# Altium PCB V2.2.1.PcbDoc
Units mm, origin at the board's own origin, x right, y up, seen from the top; angles counter-clockwise.
Board outline 50 x 50 mm, 2 copper layers (Top Layer, Bottom Layer), stack 1.57 mm thick; 57 components, 44 nets, 215 pads, 95 vias.
Unrouted connection lines stored in the file: 2.
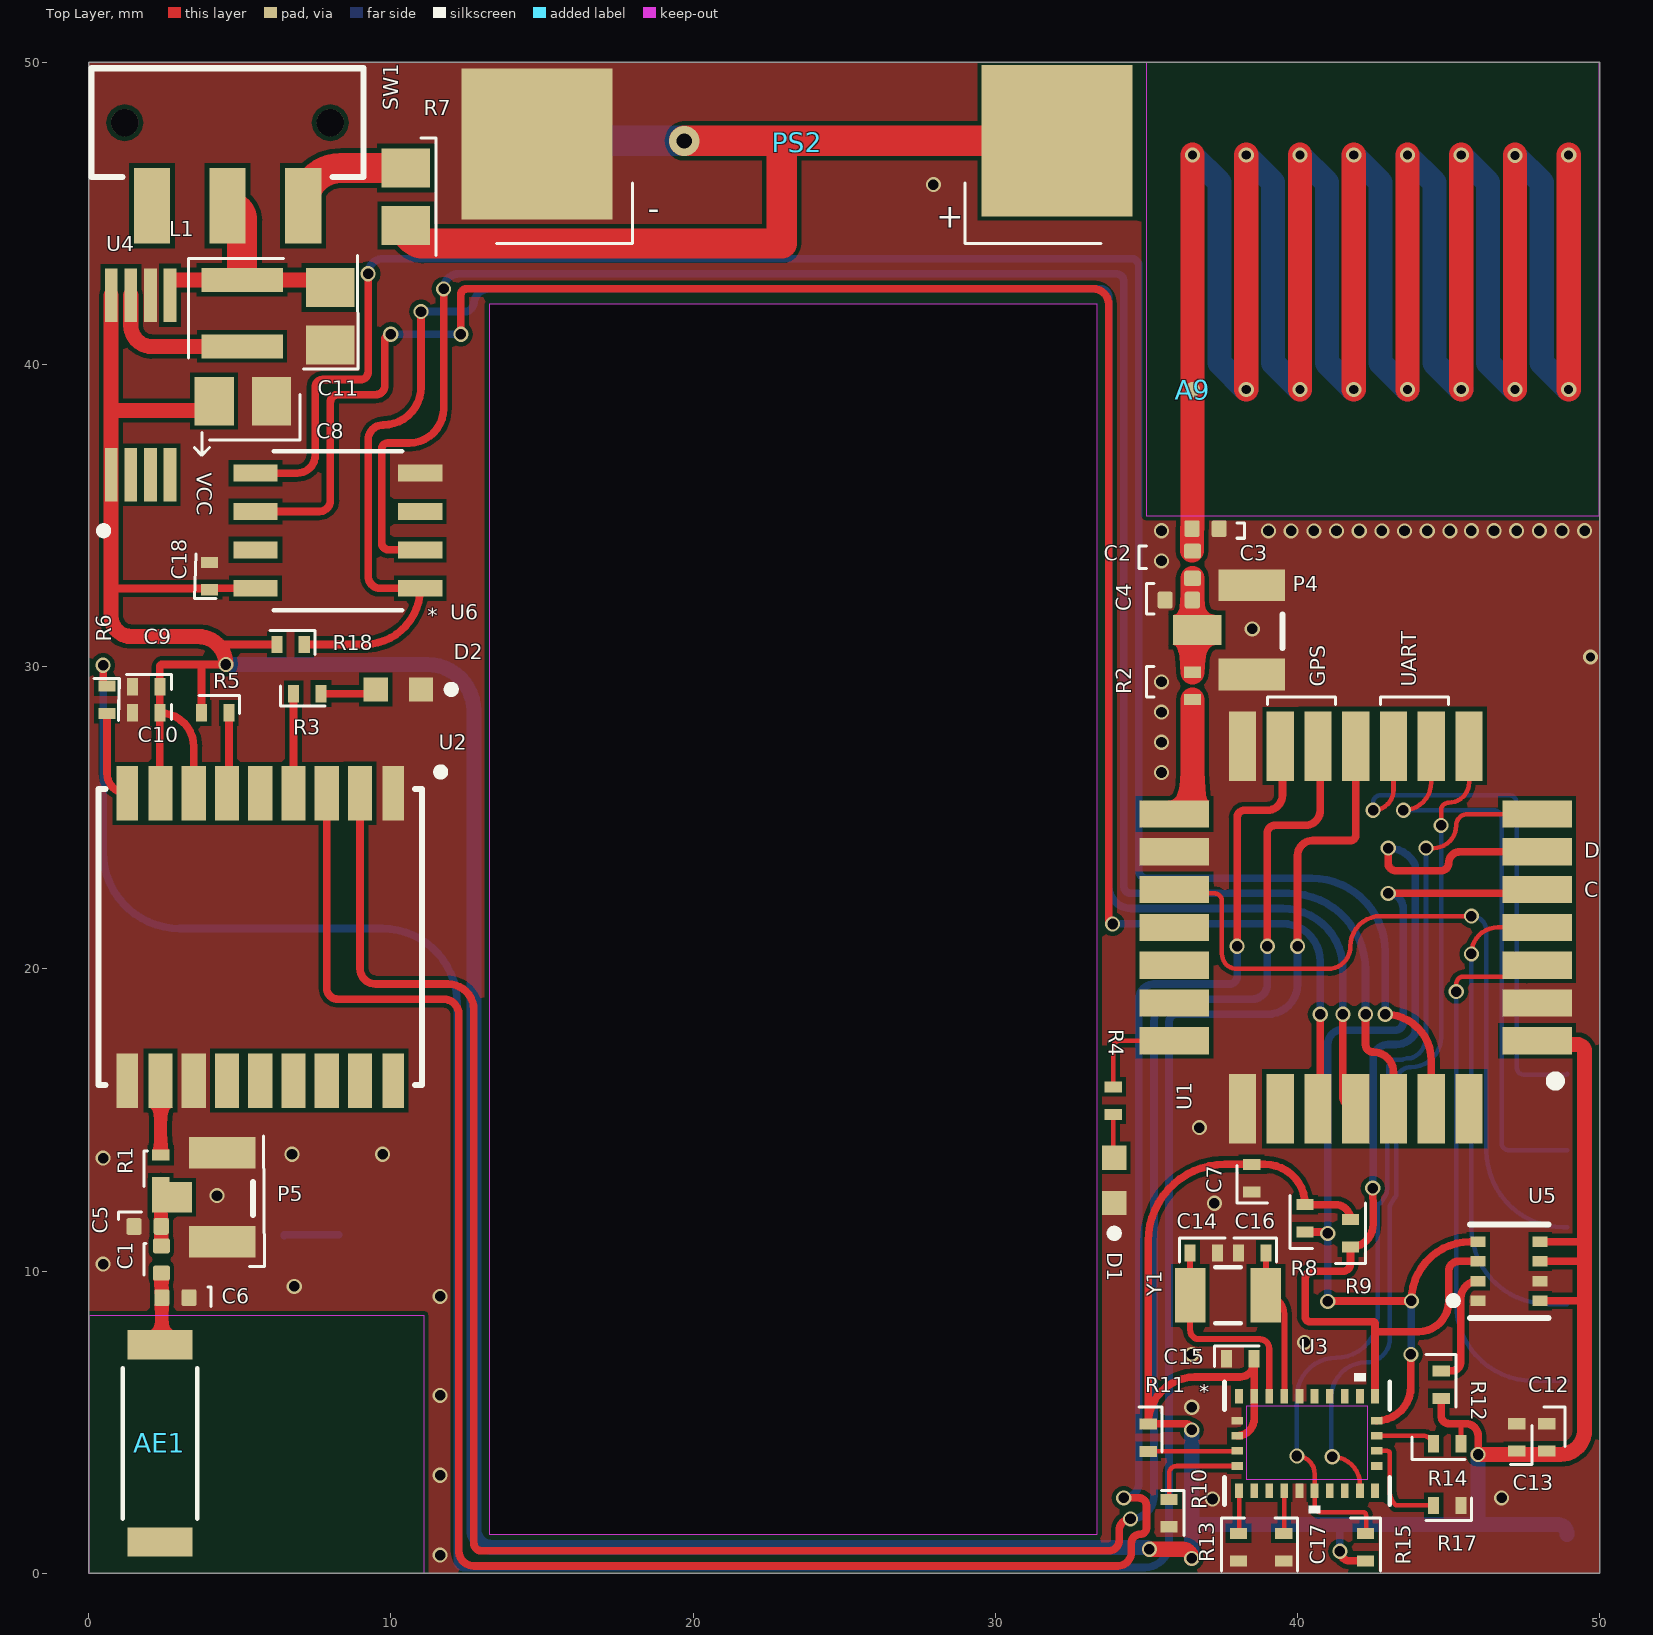
[diagram p0: Top Layer view]
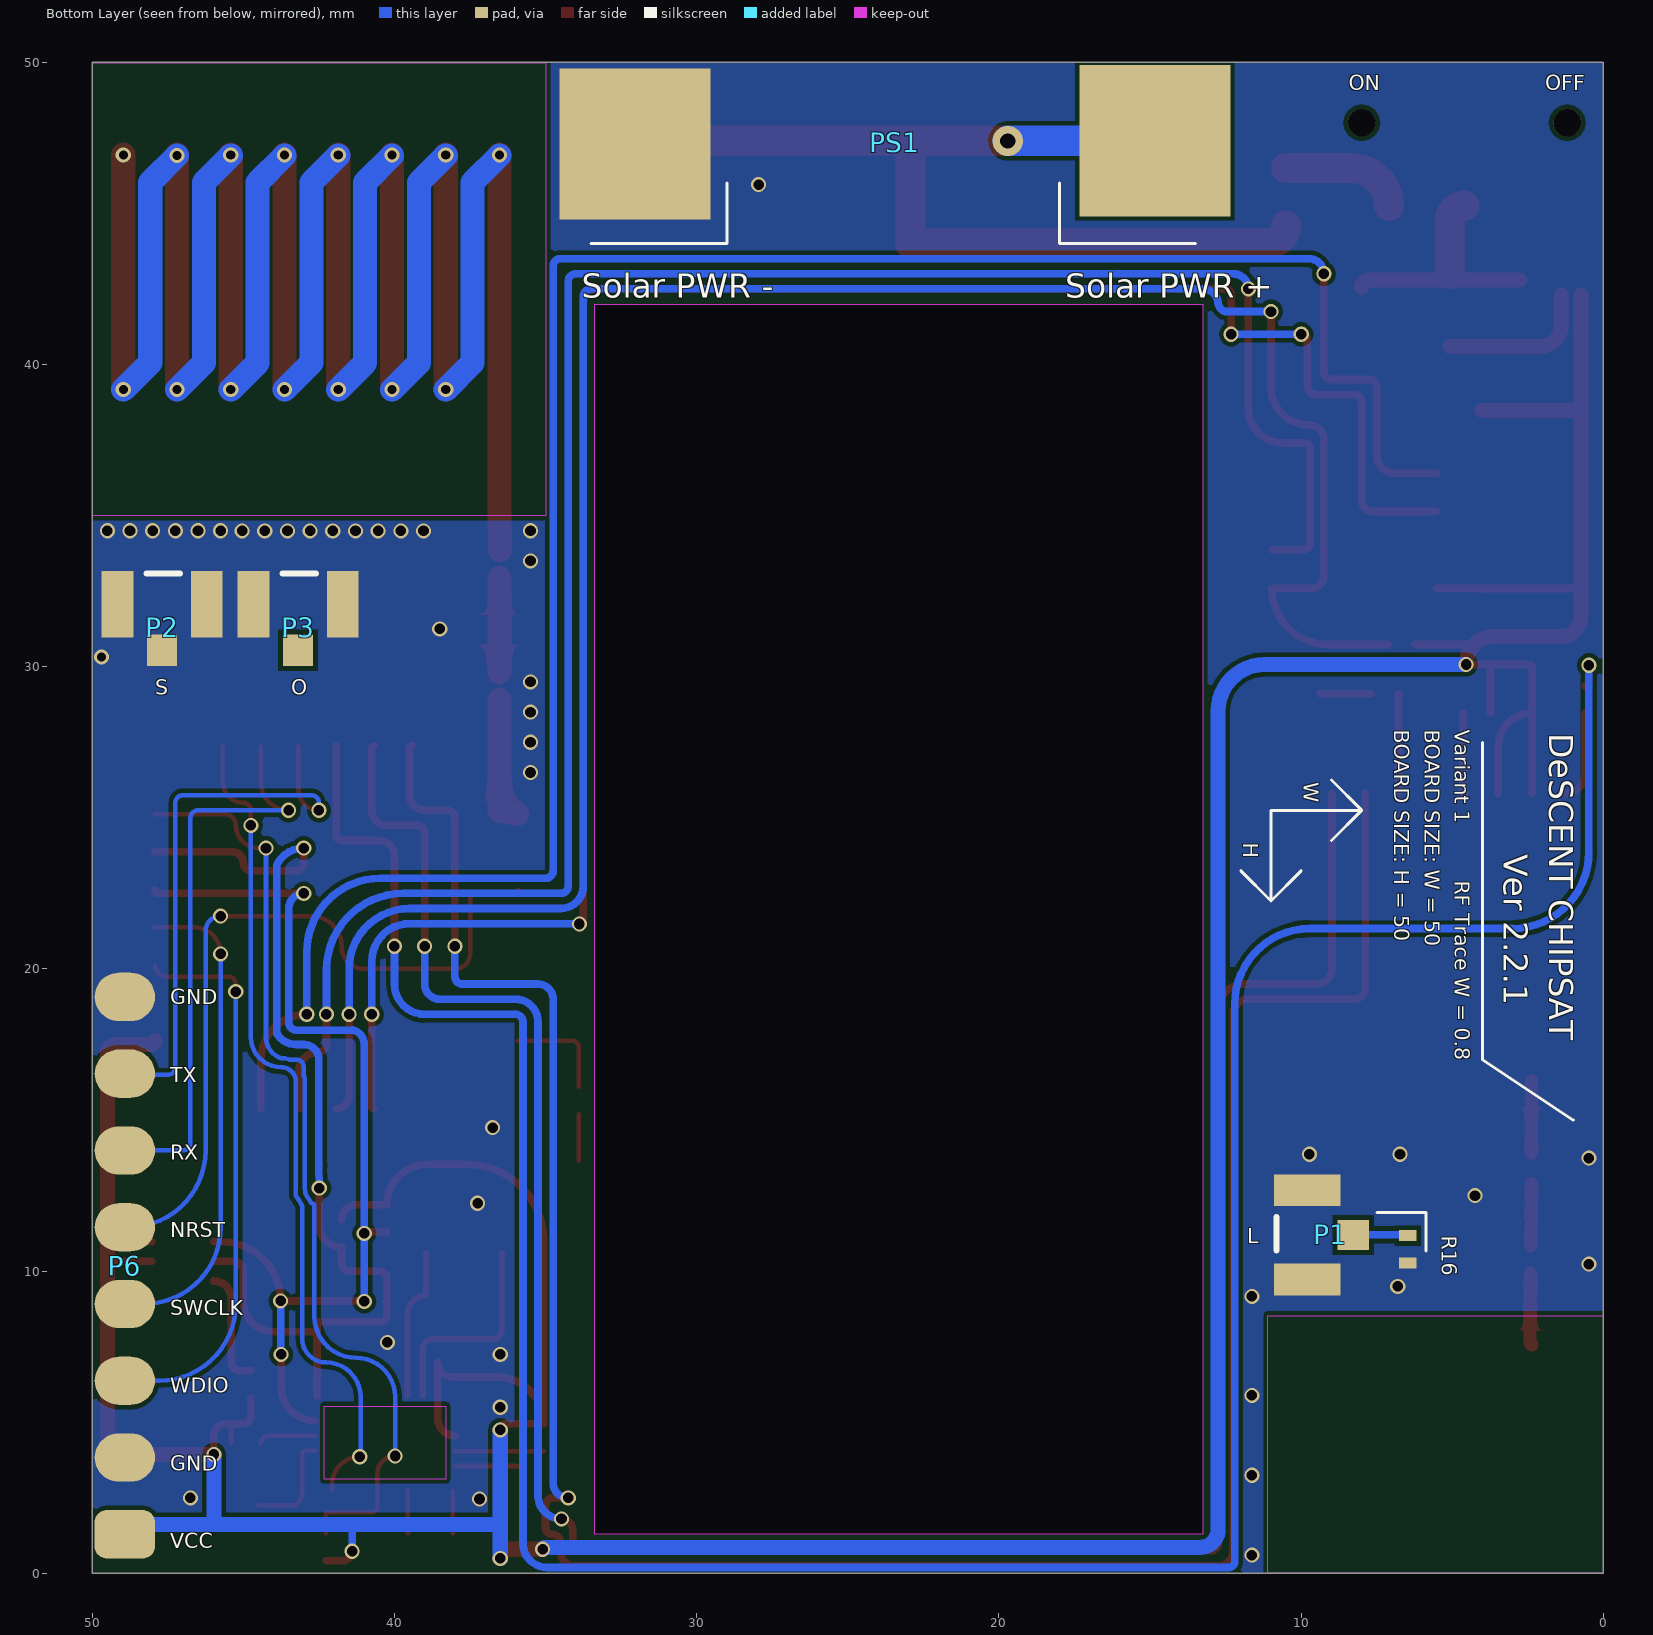
[diagram p1: Bottom Layer view, seen from below]

## Layer stack, top to bottom
Top Solder: solder mask 0.0254, SM-001, Dk 4
Top Layer: signal copper 0.035
Dielectric 1: dielectric 1.5, FR-4, Dk 4.8
Bottom Layer: signal copper 0.035
Bottom Solder: solder mask 0.0254, SM-001, Dk 4

## Board outline
0,0 50,0 50,50 0,50
cut-out: 13.259,42 13.259,1.295 33.376,1.295 33.376,42

## Design rules (kind name [scope] priority, off if disabled: settings)
Clearance [All] p1: gap=0.15 ignorepadtopadclearanceinfootprint=TRUE
ComponentClearance ComponentClearance_1 [InComponent('PS1')] p1: gap=0 collisioncheckmode=3 verticalgap=0 showdistances=FALSE
ComponentClearance [All] p2: gap=0 collisioncheckmode=3 verticalgap=0 showdistances=FALSE
MaxMinImpedance "Schematic Impedance Constraint_5" [InNet('LoRa_ANT_Tuning')] p1: minimum=49.00 maximum=51.00
MaxMinImpedance "Schematic Impedance Constraint_3" [InNet('GPS_ANT_Tuning')] p2: minimum=49.00 maximum=51.00
MaxMinImpedance "Schematic Impedance Constraint_2" [InNet('PI_NETWORK_LoRa')] p3: minimum=49.00 maximum=51.00
MaxMinImpedance "Schematic Impedance Constraint_1" [InNet('LoRa_ANT')] p4: minimum=49.00 maximum=51.00
MaxMinImpedance "Schematic Impedance Constraint" [InNet('PI_NETWORK_GPS')] p5: minimum=49.00 maximum=51.00
PlaneClearance [All] p1 off: clearance=0.508
PlaneConnect PlaneConnect_1 [InNet('VCC')] p1: planeconnectstyle=Direct reliefexpansion=0.508 reliefentries=4 reliefconductorwidth=0.254 reliefairgap=0.254
PlaneConnect [InNet('GND')] p2: planeconnectstyle=Direct reliefexpansion=0.508 reliefentries=4 reliefconductorwidth=0.254 reliefairgap=0.254
PolygonConnect [All] p1: connectstyle=Direct reliefconductorwidth=0.254 reliefentries=4 polygonreliefangle="90 Angle" airgapwidth=0.254
RoutingVias [All] p1: holewidth=0.711 width=1.27 viastyle="Through Hole" minholewidth=0.711 minwidth=1.27 maxholewidth=0.711 maxwidth=1.27
SolderMaskExpansion [All] p1: expansion=0.102 istentingtop=FALSE
SupplyNets "Schematic Supply Nets_1" [InNet('VCC')] p1: voltage=0.000
SupplyNets "Schematic Supply Nets" [InNet('GND')] p2: voltage=0.000
Width Width_1 [All] p1 off: maxlimit=0.254 minlimit=0.254 preferedwidth=0.254
Width [All] p2: maxlimit=1 minlimit=0.14 preferedwidth=0.254 minimp=50.000000 maximp=50.000000 favimp=50.000000 checkconnectedcopper=TRUE // min width
27 further rules are at their usual default settings.

## Classes and differential pairs
polygon class PolygonClass_1: GND_L01_P006

## Components (designator, comment, footprint, x,y, rotation, side; value= is the part's Value field where it differs from the comment)
A9 "helical_antenna_shorter_1_loop" LoRa_ANT_915_shorter_1_loop 35.128,34.087 r270 top
AE1 "1575AT43A0040E" ANT_1575AT_JOT-L 1.862,4.204 r90 top
C1 "C0402C223K8PACTU" PI_NET_CAPACITOR_0402 2.413,10.389 r270 top value="22,000 pF"
C2 "C0402C223K8PACTU" PI_NET_CAPACITOR_0402 36.525,33.376 r270 top value="22,000 pF"
C3 "C0402C223K8PACTU" PI_NET_CAPACITOR_0402 36.957,34.569 r180 top value="22,000 pF"
C4 "C0402C223K8PACTU" PI_NET_CAPACITOR_0402 36.068,32.207 r180 top value="22,000 pF"
C5 "C0402C223K8PACTU" PI_NET_CAPACITOR_0402 1.956,11.481 r180 top value="22,000 pF"
C6 "C0402C223K8PACTU" PI_NET_CAPACITOR_0402 2.875,9.125 r0 top value="22,000 pF"
C7 "4.7uF" 0402 38.481,13.081 r270 top
C8 "47uF" RCL_M0805 5.105,38.786 r0 top
C9 "0.1uF" 0402 1.905,29.337 r180 top
C10 "10uF" 0402 1.905,28.473 r180 top
C11 "47uF" RCL_M0805 8.001,41.595 r90 top
C12 "0.1uF" 0402 48.25,4.5 r90 top
C13 "10uF" 0402 47.25,4.5 r90 top
C14 "22pF" 0402 36.9,10.6 r0 top
C15 "0.1uF" 0402 38.1,7.1 r180 top
C16 "22pF" 0402 38.5,10.6 r180 top
C17 "0.1uF" 0402 39.548,0.873 r270 top
C18 "100nF" 0402 4,33 r90 top
D1 "LTST-C191TBKT" FP-LTST-C191TBKT-MFG 33.934,13.005 r90 top
D2 "LTST-C191TBKT" FP-LTST-C191TBKT-MFG 10.25,29.25 r180 top
L1 "10uH" "ASPI-0315FS_ASPI-0315FS - The_real_one" 5.08,41.699 r90 top
P1 "U.FL-R-SMT-1(01)" HRS-U.FL-R-SMT-3_V 9.804,11.201 r90 bottom
P2 "U.FL-R-SMT-1(01)" HRS-U.FL-R-SMT-3_V 47.69,32.072 r180 bottom
P3 "U.FL-R-SMT-1(01)" HRS-U.FL-R-SMT-3_V 43.19,32.072 r180 bottom
P4 "U.FL-R-SMT-1(01)" HRS-U.FL-R-SMT-3_V 38.481,31.217 r270 top
P5 "U.FL-R-SMT-1(01)" HRS-U.FL-R-SMT-3_V 4.42,12.446 r270 top
P6 "61300811121" "8pinhead Slightly wider" 48.92,10.185 r90 bottom
PS1 "ALTA_CELL" ALTA_CELL_SAME_SIZED_FEET_NO_SILK 23.444,47.346 r90 bottom
PS2 "ALTA_CELL" ALTA_CELL_SAME_SIZED_FEET_NO_SILK 23.444,47.346 r90 top
R1 "0k" 0402 2.388,13.386 r270 top
R2 "0k" 0402 36.525,29.362 r90 top
R3 "1k" 0402 7.239,29.108 r0 top
R4 "1k6" 0402 33.9,15.646 r90 top
R5 "0k" 0402 4.191,28.473 r0 top
R6 "0k" 0402 0.61,28.905 r270 top
R7 "0k" RCL_M0805 10.5,45.55 r90 top
R8 "2.2k" 0402 40.25,11.75 r90 top
R9 "2.2k" 0402 41.75,11.25 r90 top
R10 "10k" 0402 35.06,4.496 r90 top
R11 "10k" 0402 35.75,2 r270 top
R12 "4.7k" 0402 44.75,6.25 r270 top
R13 "10k" 0402 38.049,0.873 r270 top
R14 "10k" 0402 44.954,4.293 r180 top
R15 "10k" 0402 42.25,0.873 r270 top
R16 "50" 0402 6.475,10.725 r270 bottom
R17 "10k" 0402 44.954,2.25 r0 top
R18 "10k" 0402 6.683,30.734 r0 top
SW1 "JS102011SAQN" FP-JS102011SAQN-MFG 4.6,48 r180 top
U1 "MODULE_LORA_E5" MODULE28P-1-25-12X12X2-5MM 41.925,21.375 r180 top
U2 "MAX-M10S-00B" "FP-MAX-M10S-00B-MFG - duplicate" 5.682,21.057 r270 top
U3 "BNO085" QFN28_BNO086_CEV 40.314,4.305 r0 top
U4 "L6920" L6920_L6920 1.722,39.321 r0 top
U5 "d58e2f6669bc67e6a2bc6a28610ca79" FP-BME280-MFG 47,10 r180 top
U6 "W25Q16JVSNIQ" SOIC_150MIL_WIN 8.25,34.5 r180 top
Y1 "9HT10-32.768KBZF-T" XTAL_9HT10_TXC 37.7,9.2 r180 top

## Footprints (in the part's own frame and the unit in brackets; to place one, negate y for a bottom-side part, rotate by r counter-clockwise, add the part's x,y. Pads: shape width x height; smd on the part's side, far side on the other; paste and mask are expansions set on the pad)
"8pinhead Slightly wider" [mm] "Pin Header, pitch 2.54 mm, THT, Vertical, single row, 8p"
  rrect50% 1.6x2 smd: 1(-8.89,0)
  oval 1.6x2 smd: 2(-6.35,0) 3(-3.81,0) 4(-1.27,0) 5(1.27,0) 6(3.81,0) 7(6.35,0) 8(8.89,0)
0402 [mm]
  rect 0.365x0.572 smd paste+0 mask+0: 1(-0.454,0) 2(0.454,0)
ALTA_CELL_SAME_SIZED_FEET_NO_SILK [mm] "SAME SIZED FEET AND CORRECT POLARITY AND SILK CUT"
  rect 5x5 smd: +(0.056,-8.603) -(-0.055,8.603)
ANT_1575AT_JOT-L [mm]
  rect 0.963x2.16 smd paste+0 mask+0: 1(3.363,-0.5) 2(-3.163,-0.5)
  Keep-Out Layer region: 4.318,-9.238 4.318,1.86 -4.2,1.86 -4.2,-9.238
  silkscreen extent -2.39,-1.73 2.59,0.73
"ASPI-0315FS_ASPI-0315FS - The_real_one" [mil]
  rect 31.5x106.3 smd: 1(-43.31,0) 2(43.31,0)
FP-BME280-MFG [mm]
  rect 0.5x0.35 smd paste+0 mask+0: 1(1.025,0.975) 2(1.025,0.325) 3(1.025,-0.325) 4(1.025,-0.975) 5(-1.025,-0.975) 6(-1.025,-0.325) 7(-1.025,0.325) 8(-1.025,0.975)
  silkscreen extent -1.3,-1.55 1.97,1.55
FP-JS102011SAQN-MFG [mm]
  rect 1.2x2.5 smd paste+0 mask+0: 1(-2.5,2.75) 2(0,2.75) 3(2.5,2.75)
  round 0.9 hole 0.9 unplated paste-2539.97 mask+0: ""(-3.4,0) ""(3.4,0)
  silkscreen extent -4.5,-1.8 4.5,1.8
FP-LTST-C191TBKT-MFG [mm]
  rect 0.8x0.8 smd paste+0 mask+0: 1(-0.75,0) 2(0.75,0)
  silkscreen extent -1.87,-0.13 -1.63,0.12
"FP-MAX-M10S-00B-MFG - duplicate" [mm]
  rect 1.8x0.7 smd paste-1000 mask+0: 1(-4.75,4.4) 9(-4.75,-4.4) 10(4.75,-4.4) 18(4.75,4.4)
  rect 1.8x0.8 smd paste-1000 mask+0: 2(-4.75,3.3) 3(-4.75,2.2) 4(-4.75,1.1) 5(-4.75,0) 6(-4.75,-1.1) 7(-4.75,-2.2) 8(-4.75,-3.3) 11(4.75,-3.3) 12(4.75,-2.2) 13(4.75,-1.1) 14(4.75,0) 15(4.75,1.1) 16(4.75,2.2) 17(4.75,3.3)
  silkscreen extent -5.59,-5.35 4.9,6.09
HRS-U.FL-R-SMT-3_V [mm] "SMT, 3-Leads, Body 2.6x2.6mm"
  rect 1.05x2.2 smd: 1(-1.475,0) 2(1.475,0)
  rect 1x1.05 smd: 3(0,-1.525)
  silkscreen extent -0.51,1.02 0.59,1.02
L6920_L6920 [mm]
  rect 0.42x1.78 smd: 1(-0.975,-2.97) 2(-0.325,-2.97) 3(0.325,-2.97) 4(0.975,-2.97) 5(0.975,2.97) 6(0.325,2.97) 7(-0.325,2.97) 8(-0.975,2.97)
LoRa_ANT_915_shorter_1_loop [mil]
  round 20 smd paste-99999 mask+0: ANT(-200,55)
  Top Layer lines w31.5: -200,55 -505.87,55 ; -200,125 -505.87,125 ; -200,195 -505.87,195 ; -200,265 -505.87,265 ; -200,335 -505.87,335 ; -200,405 -505.87,405 ; -200,475 -505.87,475 ; -200,545 -505.87,545
  Bottom Layer lines w10: -505,55 -505.43,55 ; -505,125 -505.43,125 ; -505,195 -505.43,195 ; -505,265 -505.43,265 ; -505,335 -505.43,335 ; -505,405 -505.43,405 ; -505,475 -505.43,475 ; -505,545 -505.43,545
  Bottom Layer lines w31.5: -505,55 -470,90 -235,90 -200,125 ; -505,125 -470,160 -235,160 -200,195 ; -505,195 -470,230 -235,230 -200,265 ; -505,265 -470,300 -235,300 -200,335 ; -505,335 -470,370 -235,370 -200,405 ; -505,405 -470,440 -235,440 -200,475 ; -505,475 -470,510 -235,510 -200,545
  Keep-Out Layer region: -625.98,-5.55 -35.43,-5.55 -35.43,585 -625.98,585
MODULE28P-1-25-12X12X2-5MM [mm]
  rect 2.3x0.9 smd: 1(-6,3.75) 2(-6,2.5) 3(-6,1.25) 4(-6,0) 5(-6,-1.25) 6(-6,-2.5) 7(-6,-3.75) 15(6,-3.75) 16(6,-2.5) 17(6,-1.25) 18(6,0) 19(6,1.25) 20(6,2.5) 21(6,3.75)
  rect 0.9x2.3 smd: 8(-3.75,-6) 9(-2.5,-6) 10(-1.25,-6) 11(0,-6) 12(1.25,-6) 13(2.5,-6) 14(3.75,-6) 22(3.75,6) 23(2.5,6) 24(1.25,6) 25(0,6) 26(-1.25,6) 27(-2.5,6) 28(-3.75,6)
  silkscreen extent -6.73,4.95 -6.48,5.21
PI_NET_CAPACITOR_0402 [mm] "Chip Capacitor, Body 1.0x0.5mm, Height 0.6mm, NO SILK"
  rrect25% 0.5x0.55 smd: 1(-0.45,0) 2(0.45,0)
QFN28_BNO086_CEV [mil]
  rect 10x19 smd paste+0 mask+0: 1(-88.58,61.5) 6(-88.58,-61.5) 7(-68.9,-61.5) 8(-49.21,-61.5) 9(-29.53,-61.5) 10(-9.84,-61.5) 11(9.84,-61.5) 12(29.53,-61.5) 13(49.21,-61.5) 14(68.9,-61.5) 15(88.58,-61.5) 20(88.58,61.5) 21(68.9,61.5) 22(49.21,61.5) 23(29.53,61.5) 24(9.84,61.5) 25(-9.84,61.5) 26(-29.53,61.5) 27(-49.21,61.5) 28(-68.9,61.5)
  rect 15x10 smd paste+0 mask+0: 2(-91,29.53) 3(-91,9.84) 4(-91,-9.84) 5(-91,-29.53) 16(91,-29.53) 17(91,-9.84) 18(91,9.84) 19(91,29.53)
  silkscreen extent -108,-91 107,91
RCL_M0805 [mm]
  rect 1.3x1.6 smd: 1(-0.95,0) 2(0.95,0)
SOIC_150MIL_WIN [mil]
  rect 57.5x22 smd paste+0 mask+0: 1(-107.25,75) 2(-107.25,25) 3(-107.25,-25) 4(-107.25,-75) 5(107.25,-75) 6(107.25,-25) 7(107.25,25) 8(107.25,75)
  silkscreen extent -84,-104 83,104
XTAL_9HT10_TXC [mil]
  rect 39.5x71 smd paste+0 mask+0: 1(-49.25,0) 2(49.25,0)
  silkscreen extent -16,-36 16,36

## Part data
A9: "helical_antenna schematic for the DeSCENT v1 ChipSat"
AE1: "No Description Available", Mfr_Name="Johanson Technology", Digi-Key_Part_Number_1=712-1003-2-ND, Digi-Key_Part_Number_2=712-1003-1-ND, Digi-Key_Part_Number_3=712-1003-6-ND
C1 C2 C3 C4 C5 C6: library part 0402RFCapacitor_NO_SILK, "CAP CER 0.022UF 10V X5R 0402", Capacitance="22,000 pF", Manufacturer=Kemet, Package=C0402-BB, Temperature="-55°C to +125°C", Temperature Characteristic=X5R, Temperature Coefficient=15%, Temperature Range High=+125°C, Temperature Range Low=-55°C, Tolerance=0.1, Voltage Rating="10 V", Automotive=No, Category=Cap, ComponentLink2Description=Datasheet, ComponentLink2URL=https://content.kemet.com/datasheets/KEM_C1002_X7R_SMD.pdf, Device Class L1="Passive Components", Device Class L2=Capacitors, Device Class L3="Ceramic Capacitors", Digikey Description="CAP CER 0.022UF 10V X5R 0402", Height=0.55mm, Ipc Land Pattern Name=CAPC10050X50, Lead Free=Yes, Manufacturer Part Number=C0402C223K8PACTU, Material=Ceramic, Mouser Description="Multilayer Ceramic Capacitors MLCC - SMD/SMT 10volts 22000pF X5R 10%", Octopart=https://octopart.com/c0402c223k8pactu-kemet-140074, RoHS=TRUE
C7 C8 C9 C10 C11 C12 C13 C14 C15 C16 C17: library part C-EUC0805K, "CAPACITOR, European symbol", DeviceName=C0805K, DeviceSetName=C-EU, GateName_1=G$1, LibraryName=rcl, SymbolName_1=C-EU
C18: library part RCL_C-EUC0805, Package=RCL_C0805, DeviceName=C0805, DeviceSetName=RCL_C-EU, GateName_1=G$1, LibraryName=AmbaSat-1v1-01-NO-solar, SymbolName_1=RCL_C-EU
D1 D2: library part CMP-22017-000008-1, "LED BLUE CLEAR CHIP SMD", Case Code (Imperial)=0603, Case Code (Metric)=1608, Color=Blue, Forward Current=20mA, Forward Voltage=3.8V, Lens Color=Colorless, Max Operating Temperature=80°C, Max Power Dissipation=75mW, Min Operating Temperature=-20°C, Package Quantity=1, Power Dissipation=76mW, Reverse Voltage=5V, Case/Package=0603, Depth=1.6mm, Dominant Wavelength=475nm, Height=0.55mm, Illumination Color=Blue, Lead Free="Lead Free", Length=0.8mm, Lens Style=Diffused, Lens Transparency=Clear, Luminous Intensity=180mcd, Mount="Surface Mount", Number of Elements=1, Number of LEDs=1, Number of Pins=2, Packaging="Tape and Reel", Radiation Hardening=No, Test Current=20mA, Viewing Angle=130°, Wavelength=468nm, Width=0.8mm
L1: library part ASPI-0315FS, DeviceSetName=ASPI-0315FS, GateName_1=G$1, LibraryName=ASPI-0315FS, SymbolName_1=ASPI-0315FS
P1 P2 P3 P4 P5: library part CN-1P-M-R3, "Ultra Small Coaxial Connector, 6 GHz, -40 to 90 degC, 3-Pin SMD, RoHS, Bulk", Dielectric Material=LiquidCrystalPolymer(LCP), Frequency - Max=6GHz, Housing Color=Silver, Manufacturer="Hirose Electric", Operating Temperature=-40degC~90degC, Package Description="3-Pin Surface Mount Device, Body 2.6 x 2.6 mm", Package Reference=U.FL-R-SMT, Standard Package=100, Body Finish=Silver, Body Material=PhosphorBronze, Category=Connectors,Interconnects, Center Contact Material=PhosphorBronze, Center Contact Plating=Gold, Connector Style=U.FL, Connector Type=Jack,MalePin, Contact Termination=Solder, Datasheet URL=https://datasheet.ciiva.com/26945/getdatasheetpartid-475239-26945414.pdf, Datasheet Version=Feb-09, Dynamic Catalog=U.FLSeries, Family=CoaxialConnectors(RF), Fastening Type=Snap-On, Featured Product=HiroseU.FLSeries, Impedance=50Ohm, Manufacturer URL=https://www.hirose.com, Minimum Quantity=UltraMiniatureCoaxial, Mounting Type=SurfaceMount, Online Catalog=U.FLSeries, Other Names="H122041 / U.FL-R-SMT-1(01)-ND", Packaging=Bulk, Quantity Available=Bulk, Series=U.FL, Shield Termination=Solder, Unit PriceUSD=U.FL
P6: library part 8pinhead, Color=Black, Contact Resistance=20mΩ, Current Rating=3A, Max Operating Temperature=105°C, Min Operating Temperature=-40°C, Operating Supply Voltage=250V, Connector Type="Male Pin", Contact Material=Copper, Contact Mating Length=5.9944mm, Contact Plating=Gold, Gender=Male, Height=8.54mm, Lead Pitch=2.54mm, Mount="Through Hole", NexarPartId=32855533, Number of Contacts=8, Number of Pins=8, Number of Positions=8, Number of Rows=1, Orientation=Vertical, Packaging=Bulk, Pitch=2.54mm, REACH SVHC=Unknown, RoHS=Compliant, Termination=Solder, Voltage Rating=250V
PS1 PS2: library part ALTA_CELL_RESIZED_NO_SILK, "No SILK", DeviceSetName=ALTA_CELL, GateName_1=G$1, LibraryName=ALTA_CELL, SymbolName_1=ALTA_CELL
R1 R2: library part R-EU_M0805, DeviceName=M0805, DeviceSetName=R-EU_, GateName_1=G$1, LibraryName=rcl, SymbolName_1=R-EU
R3 R4 R5 R6 R8 R9 R10 R11 R12 R13 R14 R15 R16 R17 R18: library part R-EU_M0805, "RESISTOR, European symbol", DeviceName=M0805, DeviceSetName=R-EU_, GateName_1=G$1, LibraryName=rcl, SymbolName_1=R-EU
R7: library part R-EU_M0805, "Larger Resistor for Solar", DeviceName=M0805, DeviceSetName=R-EU_, GateName_1=G$1, LibraryName=rcl, SymbolName_1=R-EU
SW1: library part CMP-2000-06501-2, "SWITCH SLIDE SPDT 300MA 6V", Case/Package=100, Contact Current Rating=300mA, Contact Resistance=70mR, Max Operating Temperature=85°C, Max Voltage Rating (DC)=6V, Min Operating Temperature=-40°C, Package Quantity=1, Actuator Length=2mm, Actuator Material=Nylon, Actuator Type=Standard, Contact Material="Copper Alloy", Contact Plating=Silver, Current Rating=300mA, Electrical Life=5000Cycles, Housing Material=Nylon, Illumination Type=Non-Illuminated, Lead Free="Lead Free", Length=9mm, Max Current Rating=300mA, Mount="Surface Mount", Orientation="Right Angle", Packaging="Tape and Reel", Radiation Hardening=No, REACH SVHC="No SVHC", Switch Function=On-On, Switch Travel=2mm, Termination="Gull Wing", Throw Configuration=SPDT, Voltage Rating (DC)=6V
U1: Package=MODULE28P-1.25-12X12X2.5MM, DeviceSetName=MODULE_LORA_E5, GateName_1=G$1, LibraryName=LORA-E5_Eagle_Library, SymbolName_1=MOUDLE_LORA_E5
U2: library part CMP-207130-000026-1, "GNSS LCC RX, ROM, TCXO, LNA, SAW"
U3: library part BNO086, "No Description Available", Mfr_Name=CEVA, RefDes=RefDes, Type="Motion Sensors"
U4: "Voltage stepper upper L6920DTR model", DeviceSetName=L6920, GateName_1=G$1, LibraryName=L6920, SymbolName_1=L6920
U5: "Temp and huminity sensor"
U6: "No Description Available", Mfr_Name=Winbond, RefDes=RefDes, Type=Type
Y1: "Crystal, 32.768khz, 12.5pf, 3.2 x 1.5mm", Package=None, Availability=Unavailable, MP=9HT10-32.768KBZF-T, Price=None

## Free pads (board coordinates)
  rect 1x1 smd: 1(36.373,31.217)
  rect 0.5x1 smd: 2(2.35,12.45)

## Via types
v1: diameter 0.5, hole 0.35, Top Layer to Bottom Layer, tented both sides, 46 vias
v2: diameter 0.5, hole 0.35, Top Layer to Bottom Layer, 32 vias
v3: diameter 0.5, hole 0.3, Top Layer to Bottom Layer, 15 vias
v4: diameter 1, hole 0.5, Top Layer to Bottom Layer, tented both sides, 1 vias
v5: diameter 0.5, hole 0.3, Top Layer to Bottom Layer, tented both sides, 1 vias

## Nets (pads, with @x,y where several pads share a name; then routed paths per layer and width w, separated by ;. In a path a pad name is that pad's centre, name@x,y a point inside that pad or via, vN(x,y) a via of type N, cw(c..) or ccw(c..) an arc to the next point about the centre after c; other vN are vias at no path point)
CS: R18.2 U1.25 U6.1 | length 73.6
  Top Layer w0.254: R18.2 9.113,30.734 ccw(c9.113,32.595) U6.1 9.655,32.595 cw(c9.655,33) 9.25,33 9.25,37.5 cw(c9.75,37.5) 9.75,38 ccw(c9.75,39.25) 11,39.25 v1(11,41.75) ; v1(41.5,18.5) 41.5,15.8 ccw(c41.925,15.8) U1.25
  Bottom Layer w0.254: v1(11,41.75) 12.467,41.75 ccw(c12.467,42.004) 12.685,41.873 cw(c13.628,41.3) 12.71,41.913 ccw(c12.498,42.052) 12.751,42.034 ; 12.751,42.035 cw(c13.25,42) 13.25,42.5 33.5,42.5 cw(c33.5,42.25) 33.75,42.25 33.75,22.75 ccw(c34.5,22.75) 34.5,22 39.5,22 cw(c39.5,20) 41.5,20 v1(41.5,18.5)
GND: C3.1 C4.2 C5.2 C6.2 C7.2 C8.2 C9.2 C10.2 C11.1 C12.2 C13.2 C14.2 C15.2 C16.2 C17.2 C18.2 D1.1 D2.1 P1.1 P1.2 P2.1 P2.2 P2.3 P3.1 P3.2 P4.1 P4.2 P5.1 P5.2 P6.2 P6.8 PS1.- PS2.- R11.2 R13.2 R16.2 R17.2 U1.2 U1.14 U1.16 U1.22 U2.1 U2.10 U2.12 U3.2 U3.10 U3.25 U4.6 U5.1 U5.7 U6.4
  other v1: 37.186,2.464 46.75,2.5 36.5,5.5 36.5,7.25 40.234,7.645 37.25,12.25 36.75,14.75 27.95,45.95
  other v2: 11.633,0.61 11.633,3.251 11.633,5.893 11.633,9.169 6.807,9.5 0.483,10.236 4.25,12.5 0.483,13.741 6.731,13.868 9.728,13.868 35.5,26.5 35.5,27.5 35.5,28.5 35.5,29.5 38.5,31.25 35.5,33.5 35.5,34.5 39.04,34.493 39.79,34.493 40.54,34.493 41.29,34.493 42.04,34.493 42.79,34.493 43.54,34.493 44.29,34.493 45.04,34.493 45.75,34.5 46.5,34.5 47.25,34.5 48,34.5 48.75,34.5 49.5,34.5
  other v5: 49.69,30.322
GPS_ANT: AE1.1 C1.2 C6.1 | length 2.4
  Top Layer w0.43: AE1.1 ccw(c2.362,7.63) 2.425,7.63 C6.1 2.413,9.125 C1.2
GPS_ANT_Tuning: C1.1 C5.1 P5.3 pad.2 R1.2 | length 2.1
  Top Layer w0.43: pad.2@2.388,12.9 2.388,11.541 C5.1 C1.1
GPS_RESET: R6.1 U1.11 | length 95.8
  Top Layer w0.254: v1(0.483,30.048) 0.483,29.486 ccw(c0.61,29.486) R6.1 ; v1(40,20.75) 40,23.75 cw(c40.5,23.75) 40.5,24.25 41.75,24.25 ccw(c41.75,24.425) 41.925,24.425 U1.11
  Bottom Layer w0.254: v1(0.483,30.048) 0.483,23.876 ccw(c3.023,23.876) 3.023,21.336 9.71,21.336 cw(c9.71,18.846) 12.2,18.846 12.2,0.4 ccw(c12.4,0.4) 12.4,0.2 34.95,0.2 ccw(c34.95,1) 35.75,1 35.75,18.25 cw(c36,18.25) 36,18.5 39,18.5 ccw(c39,19.5) 40,19.5 v1(40,20.75)
GPS_RX: U1.12 U2.2 | length 81.3
  Top Layer w0.254: U2.2 8.982,20.018 ccw(c9.5,20.018) 9.5,19.5 11.887,19.5 cw(c11.887,18.637) 12.75,18.637 12.75,1 ccw(c13,1) 13,0.75 33.75,0.75 ccw(c33.75,1.1) 34.1,1.1 34.1,1.431 cw(c34.473,1.431) v1(34.473,1.804) ; v1(39,20.75) 39,24.5 cw(c39.25,24.5) 39.25,24.75 40.25,24.75 ccw(c40.25,25.25) 40.75,25.25 40.75,27.3 ccw(c40.675,27.3) U1.12
  Bottom Layer w0.254: v1(34.473,1.804) ccw(c34.473,2.581) 35.25,2.581 35.25,18.25 cw(c36,18.25) 36,19 38.5,19 ccw(c38.5,19.5) 39,19.5 v1(39,20.75)
GPS_TX: U1.13 U2.3 | length 83.9
  Top Layer w0.254: U2.3 7.882,19.368 ccw(c8.25,19.368) 8.25,19 11.75,19 cw(c11.75,18.5) 12.25,18.5 12.25,0.75 ccw(c12.75,0.75) 12.75,0.25 34.05,0.25 ccw(c34.05,0.7) 34.5,0.7 34.5,1 cw(c34.8,1) 34.8,1.3 ccw(c34.8,1.5) 35,1.5 35,2.25 ccw(c34.75,2.25) 34.75,2.5 v1(34.25,2.5) ; v1(38,20.75) 38,25 cw(c38.25,25) 38.25,25.25 39,25.25 ccw(c39,25.75) 39.5,25.75 39.5,27.3 ccw(c39.425,27.3) U1.13
  Bottom Layer w0.254: v1(34.25,2.5) ccw(c34.25,3) 34.75,3 34.75,19 cw(c35.25,19) 35.25,19.5 37.75,19.5 ccw(c37.75,19.75) 38,19.75 v1(38,20.75)
IMU_INTN: U1.8 U3.14 | length 27.7
  Top Layer w0.15: v1(41.148,3.861) cw(c41.148,2.945) 42.064,2.945 U3.14 ; v1(44.75,24.75) 44.75,25.25 cw(c45,25.25) 45,25.5 ccw(c45,26.175) 45.675,26.175 U1.8
  Bottom Layer w0.15: v1(41.148,3.861) cw(c41.148,3.886) 41.123,3.886 41.123,5.842 cw(c42.266,5.842) 42.266,6.985 ccw(c42.266,7.772) 43.053,7.772 43.053,12.127 cw(c43.203,12.127) 43.075,12.206 43.16,12.343 ccw(c42.905,12.501) 43.16,12.344 ccw(c42.5,12.75) 43.18,12.378 cw(c43.311,12.305) 43.202,12.408 ccw(c42.951,12.65) 43.263,12.494 43.263,16.263 cw(c43.75,16.263) 43.75,16.75 ccw(c43.75,17.75) 44.75,17.75 v1(44.75,24.75)
IMU_RESET: R15.1 U1.7 U3.11 | length 31.4
  Top Layer w0.15: v1(39.98,3.886) cw(c39.98,3.302) 40.564,3.302 U3.11 40.564,2.21 ccw(c40.742,2.21) 40.742,2.032 42.164,2.032 cw(c42.164,1.93) 42.266,1.93 42.266,1.327 R15.1 ; v1(44.25,24) 44.5,24 ccw(c44.5,24.75) 45.25,24.75 cw(c45.625,24.75) 45.625,25.125 U1.7
  Bottom Layer w0.15: v1(39.98,3.886) 39.98,5.842 cw(c41.275,5.842) 41.275,7.137 ccw(c41.275,8.509) 42.647,8.509 42.647,12.147 cw(c42.75,12.147) 42.75,12.25 42.905,12.501 ccw(c42.5,12.75) 42.951,12.602 ccw(c42.809,12.649) 42.959,12.643 42.962,12.731 ccw(c42.488,12.75) 42.963,12.75 42.963,16.263 cw(c43.75,16.263) 42.994,16.483 ccw(c42.85,16.524) 43,16.524 43,16.75 cw(c43.25,16.75) 43.25,17 43.448,17 ccw(c43.448,17.15) 43.496,17.008 cw(c43.75,16.263) 43.742,17.05 ccw(c43.74,17.2) 43.798,17.062 ; 43.8,17.062 ccw(c43.5,17.75) 44.25,17.75 v1(44.25,24)
LoRa_ANT: A9.ANT C2.1 C3.2 | length 5.3
  Top Layer w0.37: C2.1@36.507,33.844 ccw(c36.525,33.844) C2.1
  Top Layer w0.8: C2.1@36.507,33.844 C3.2 ; C3.2@36.525,34.588 A9.ANT
  other v3: 38.303,39.167 40.081,39.167 41.859,39.167 43.637,39.167 45.415,39.167 47.193,39.167 48.971,39.167 47.193,46.914 36.525,46.936 38.303,46.936 40.081,46.936 41.859,46.936 43.637,46.936 45.415,46.936 48.971,46.936
LoRa_ANT_Tuning: C2.2 C4.1 P4.3 pad.1 R2.2 | length 3.1
  Top Layer w0.8: R2.2 C4.1 36.522,32.211 36.522,32.922 C2.2
MISO: U1.26 U6.2 | length 68.9
  Top Layer w0.254: U6.2 9.935,33.865 cw(c9.935,34.1) 9.7,34.1 9.7,37.2 cw(c9.9,37.2) 9.9,37.4 10.6,37.4 ccw(c10.6,38.55) 11.75,38.55 v1(11.75,42.5) ; v1(42.25,18.5) 42.25,17.5 ccw(c42.5,17.5) 42.5,17.25 cw(c42.5,16.575) 43.175,16.575 U1.26
  Bottom Layer w0.254: v1(11.75,42.5) cw(c12.25,42.5) 12.25,43 34,43 cw(c34,42.75) 34.25,42.75 34.25,22.75 ccw(c34.5,22.75) 34.5,22.5 39.71,22.5 cw(c39.71,19.96) 42.25,19.96 v1(42.25,18.5)
MOSI: U1.27 U6.5 | length 71.5
  Top Layer w0.254: U6.5 6.905,36.405 ccw(c6.905,37) 7.5,37 7.5,39.25 cw(c7.75,39.25) 7.75,39.5 9,39.5 ccw(c9,39.75) 9.25,39.75 v1(9.25,43) ; v1(42.9,18.5) cw(c42.9,16.975) 44.425,16.975 U1.27
  Bottom Layer w0.254: v1(9.25,43) cw(c9.75,43) 9.75,43.5 34.5,43.5 cw(c34.5,43.25) 34.75,43.25 34.75,23.25 ccw(c35,23.25) 35,23 40.46,23 cw(c40.46,20.56) 42.9,20.56 v1(42.9,18.5)
NetC14_1: C14.1 U3.27 Y1.2 | length 7.1
  Top Layer w0.2: C14.1 36.449,10.6 Y1.2 36.449,8.051 ccw(c36.75,8.051) 36.75,7.75 38.75,7.75 cw(c38.75,7.436) 39.064,7.436 U3.27
NetC16_1: C16.1 U3.26 Y1.1 | length 5.1
  Top Layer w0.2: C16.1 38.954,9.2 Y1.1 cw(c38.951,8.587) 39.564,8.587 U3.26
NetC17_1: C17.1 U3.9 | length 1.4
  Top Layer w0.15: C17.1 39.564,1.327 U3.9
NetD1_2: D1.2 R4.1 | length 1.5
  Top Layer w0.15: D1.2@33.9,13.65 R4.1
NetD2_2: D2.2 R3.2 | length 1.7
  Top Layer w0.254: R3.2 9.375,29.108 D2.2@9.375,29.125
NetL1_1: L1.1 U4.7 | length 5.1
  Top Layer w0.5: U4.7 1.397,41.3 ccw(c2.108,41.3) 2.108,40.589 5.08,40.589 L1.1
NetP1_3: P1.3 R16.1 | length 1.8
  Bottom Layer w0.254: R16.1 6.475,11.201 P1.3
NetPS1_+: PS1.+ PS2.+ R7.1 | length 33.4
  Top Layer w1: R7.1 ccw(c11.1,44.6) 11.1,44 22.936,44 22.936,47.402 ; v4(19.71,47.396) 19.71,47.402 22.936,47.402 ; PS2.+ 22.936,47.402
  Bottom Layer w1: PS1.+ 19.71,47.402 v4(19.71,47.396)
NetR3_1: R3.1 U2.4 | length 3.3
  Top Layer w0.254: U2.4 6.782,29.108 R3.1
NetR4_2: R4.2 U1.21 | length 3.5
  Top Layer w0.15: R4.2 33.9,17.4 cw(c34.125,17.4) 34.125,17.625 U1.21
NetR5_2: R5.2 U2.6 | length 2.7
  Top Layer w0.254: U2.6 ccw(c4.582,25.87) 4.645,25.87 R5.2
NetR6_2: R6.2 U2.9 | length 3
  Top Layer w0.254: R6.2 0.61,26.479 ccw(c1.282,26.479) U2.9
NetR7_2: R7.2 SW1.1 | length 4.1
  Top Layer w1: SW1.1 cw(c8.35,45.25) 8.35,46.5 R7.2
NetR10_1: R10.1 U3.4 | length 3
  Top Layer w0.15: R10.1 38.002,4.042 U3.4
NetR11_1: R11.1 U3.5 | length 3.2
  Top Layer w0.15: R11.1 35.75,3.305 cw(c36,3.305) 36,3.555 U3.5
NetR12_1: R12.1 U5.2 | length 3.8
  Top Layer w0.254: R12.1 45.104,6.704 ccw(c45.104,7) 45.4,7 45.4,8.886 cw(c45.654,8.885) 45.401,8.902 ccw(c44,9) 45.404,9 45.404,9.152 cw(c45.658,9.151) 45.407,9.189 cw(c45.975,9.1) 45.852,9.662 U5.2
NetR13_1: R13.1 U3.6 | length 1.4
  Top Layer w0.15: R13.1 38.064,1.327 U3.6
NetR14_2: R14.2 U3.18 | length 2
  Top Layer w0.15: U3.18 44.165,4.555 cw(c44.165,4.293) R14.2@44.428,4.293
NetR17_1: R17.1 U3.17 | length 3.5
  Top Layer w0.15: U3.17 42.946,4.055 cw(c42.946,3.912) 43.048,4.013 43.048,2.739 ccw(c43.739,2.739) 43.25,2.25 R17.1
NRST: P6.5 U1.17 | length 25.2
  Top Layer w0.15: U1.17 ccw(c36.05,22.625) 36.05,22.5 37.25,22.5 cw(c37.25,22.25) 37.5,22.25 37.5,20.5 ccw(c38,20.5) 38,20 41,20 ccw(c41,20.75) 41.75,20.75 cw(c42.75,20.75) 42.75,21.75 v1(45.75,21.75)
  Bottom Layer w0.15: v1(45.75,21.75) cw(c45.75,21.25) 46.25,21.25 46.25,13.995 ccw(c48.79,13.995) 48.79,11.455 P6.5
PI_NETWORK_GPS: R1.1 U2.11 | length 2.4
  Top Layer w0.43: U2.11 2.388,15.622 R1.1@2.388,13.9
PI_NETWORK_LoRa: R2.1 U1.15 | length 4.3
  Top Layer w0.8: U1.15 36.525,25.225 R2.1
RX: P6.6 U1.9 | length 19.1
  Top Layer w0.15: v1(43.5,25.25) ccw(c43.5,26.175) 44.425,26.175 U1.9
  Bottom Layer w0.15: v1(43.5,25.25) 46.5,25.25 cw(c46.5,25) 46.75,25 46.75,14.25 ccw(c47,14.25) 47,14 48.92,14 P6.6
SCK: U1.24 U6.6 | length 68.4
  Top Layer w0.254: U6.6 7.635,35.135 ccw(c7.635,35.5) 8,35.5 8,38.75 cw(c8.25,38.75) 8.25,39 9.5,39 ccw(c9.5,39.3) 9.8,39.3 9.8,40.8 cw(c10,40.8) v1(10,41) ; v1(12.319,41) 12.319,42.319 cw(c12.5,42.319) 12.5,42.5 33.25,42.5 cw(c33.25,42) 33.75,42 33.75,21.622 ccw(c33.884,21.622) v1(33.884,21.488) ; U1.24 ccw(c40.675,15.45) 40.75,15.45 v1(40.75,18.5)
  Bottom Layer w0.254: v1(10,41) v1(12.319,41) ; v1(33.884,21.488) 33.884,21.5 39.5,21.5 cw(c39.5,20.25) 40.75,20.25 v1(40.75,18.5)
SCL: R8.1 U1.5 U3.19 U5.4 | length 32.5
  Top Layer w0.254: R8.1 40.954,11.296 cw(c40.954,11.25) v1(41,11.25) ; v1(41,9) 41,9.017 v1(43.764,9.017) cw(c45.722,9.017) 45.722,10.975 U5.4 ; U3.19 ccw(c42.625,6.18) 43.75,6.18 v1(43.75,7.25) ; v1(43,22.5) 47.8,22.5 ccw(c47.8,22.625) U1.5
  Bottom Layer w0.254: v1(41,9) v1(41,11.25) 41,17.5 cw(c41.5,17.5) 41.301,17.959 cw(c41.401,17.725) 41.433,17.977 ccw(c41.5,18.5) 41.5,17.973 43.223,17.973 ccw(c43.223,18.25) 43.428,18.063 ccw(c43.223,18.25) 43.431,18.067 ccw(c43.24,18.235) 43.493,18.254 43.493,22.007 ccw(c43,22.007) v1(43,22.5) ; v1(43.75,7.25) 43.757,7.257 43.757,9.01 v1(43.764,9.017)
SDA: R9.1 U1.6 U3.20 U5.3 | length 34.6
  Top Layer w0.254: v1(42.488,12.75) 42.5,11.996 cw(c42.246,11.992) 42.5,11.992 42.5,11.546 cw(c41.75,11.546) R9.1 41.75,10.25 cw(c41.5,10.25) 41.5,10 40.5,10 ccw(c40.5,9.75) 40.25,9.75 40.25,8.5 ccw(c40.424,8.5) 40.424,8.326 42.5,8.326 cw(c42.5,8.262) 42.564,8.262 42.564,8 ; U3.20 42.564,8 ; v1(43,24) 43,23.5 ccw(c43.25,23.5) 43.25,23.25 44.75,23.25 ccw(c44.75,23.5) 45,23.5 cw(c45.375,23.5) 45.375,23.875 U1.6 ; U5.3 45.325,10.325 ccw(c45.325,10) 45,10 45,9 cw(c44,9) 44,8 42.564,8
  Bottom Layer w0.254: v1(42.488,12.75) 42.5,13.504 ccw(c42.246,13.508) 42.5,13.508 42.5,17 cw(c43,17) 43,17.5 43.25,17.5 ccw(c43.25,18.25) 43.846,17.794 ccw(c43.25,18.25) 43.847,17.796 ccw(c43.644,17.949) 43.898,17.948 43.898,23.378 ccw(c43.644,23.377) 43.864,23.504 ; v1(43,24) cw(c43,23) 43.863,23.505
SWCLK: P6.4 U1.4 | length 16.3
  Top Layer w0.15: v1(45.75,20.5) cw(c46.625,20.5) 46.625,21.375 U1.4
  Bottom Layer w0.15: v1(45.75,20.5) 45.75,11.455 ccw(c48.29,11.455) 48.29,8.915 P6.4
SWDIO: P6.3 U1.3 | length 18.7
  Top Layer w0.15: v1(45.25,19.25) 45.25,19.5 cw(c45.5,19.5) 45.5,19.75 47.55,19.75 ccw(c47.55,20.125) U1.3
  Bottom Layer w0.15: v1(45.25,19.25) 45.25,8.915 ccw(c47.79,8.915) 47.79,6.375 P6.3
TX: P6.7 U1.10 | length 18.4
  Top Layer w0.15: v1(42.5,25.25) ccw(c42.5,25.925) 43.175,25.925 U1.10
  Bottom Layer w0.15: v1(42.5,25.25) 42.5,25.5 cw(c42.75,25.5) 42.75,25.75 47,25.75 cw(c47,25.5) 47.25,25.5 47.25,16.75 ccw(c47.5,16.75) 47.5,16.5 48.885,16.5 ccw(c48.885,16.535) P6.7
VCC: C7.1 C8.1 C9.1 C10.1 C12.1 C13.1 C15.1 C18.1 P6.1 R5.1 R8.2 R9.2 R10.2 R12.2 R14.1 R15.2 R18.1 U1.1 U2.7 U2.8 U3.3 U3.28 U4.1 U4.8 U5.5 U5.6 U5.8 U6.8 | length 169
  Top Layer w0.15: 45.287,4.956 cw(c45.287,4.835) 45.408,4.835 R14.1
  Top Layer w0.25: v1(41.402,0.737) ccw(c41.719,0.737) 41.719,0.419 R15.2
  Top Layer w0.254: 0.747,32.563 cw(c0.772,32.563) 0.772,32.588 3.958,32.588 cw(c3.958,32.546) C18.1 cw(c4.049,32.546) 4.049,32.595 U6.8 ; U2.8 cw(c2.382,25.83) 2.359,25.83 C10.1 ; U2.7 3.482,27.351 ccw(c2.359,27.351) C10.1 ; R5.1 3.737,30.013 ; 3.972,30.931 ccw(c4.168,30.931) 4.168,30.734 4.27,30.734 R18.1 ; v1(4.547,30.074) 2.426,30.074 ccw(c2.426,30.048) 2.4,30.048 ccw(c2.4,30.007) 2.359,30.007 C9.1 C10.1 ; v1(36.5,4.75) ccw(c36.3,4.75) 36.3,4.95 R10.2 ; U3.3 ccw(c38.002,5.117) 38.564,5.117 U3.28 38.564,6.982 cw(c38.082,6.982) 38.082,6.5 36.61,6.5 ccw(c36.61,4.95) R10.2 ; C7.1@38.474,13.535 37.6,13.535 ccw(c37.6,10.995) 35.06,10.995 R10.2 ; C7.1 38.919,13.535 cw(c38.919,12.204) R8.2 41.25,12.204 cw(c41.25,11.704) R9.2 ; R12.2 44.755,5.796 44.755,5.207 ccw(c45.006,5.207) 45.006,4.956 45.287,4.956 45.568,4.956 cw(c45.568,4.55) 45.974,4.55 v1(45.974,3.937) ; C13.1@47.241,4.037 C13.1 ; U5.8 49.475,9.025 ; U5.6 49.425,10.325 ; U5.5 49.475,10.975 ccw(c49.475,11) 49.5,11
  Top Layer w0.5: U4.8 0.747,38.481 ; C8.1@4.039,38.481 0.747,38.481 ; v1(4.547,30.074) ccw(c3.62,30.074) 4.27,30.734 ccw(c3.62,30.074) 3.972,30.931 ccw(c3.62,30.074) 3.62,31 1.407,31 cw(c1.407,31.66) 0.747,31.66 0.747,32.563 U4.1 0.747,38.481 ; v1(35.1,0.8) 36.2,0.8 cw(c36.2,0.5) v1(36.5,0.5) ; v1(45.974,3.937) 48.687,3.937 ccw(c48.687,4.75) 49.5,4.75 49.5,11 49.5,17.25 ccw(c49.25,17.25) 49.25,17.5 48.05,17.5 cw(c48.05,17.625) U1.1
  Bottom Layer w0.25: v1(41.402,0.737) 41.402,1.626
  Bottom Layer w0.5: v1(4.547,30.074) 11.21,30.074 cw(c11.21,28.534) 12.75,28.534 12.75,1.449 ccw(c13.335,1.449) 13.335,0.864 35.036,0.864 v1(35.1,0.8) ; v1(36.5,0.5) 36.5,1.626 ; v1(36.5,4.75) 36.5,1.626 ; v1(45.974,3.937) 45.974,1.651 ccw(c45.999,1.651) 45.999,1.626 ; P6.1 ccw(c48.59,1.295) 48.59,1.626 45.999,1.626 ; 36.5,1.626 41.402,1.626 45.999,1.626
VIN: C11.2 L1.2 SW1.2 U4.5 | length 7.9
  Top Layer w0.5: U4.5@2.769,42.799 L1.2 7.747,42.799 cw(c7.747,42.545) C11.2
  Top Layer w1: SW1.2 cw(c4.6,44.77) 5.08,44.77 L1.2@5.08,43
pads on no net: AE1.2 P3.3 SW1. SW1.3 U1.18 U1.19 U1.20 U1.23 U1.28 U2.5 U2.13 U2.14 U2.15 U2.16 U2.17 U2.18 U3.1 U3.7 U3.8 U3.12 U3.13 U3.15 U3.16 U3.21 U3.22 U3.23 U3.24 U4.2 U4.3 U4.4 U6.3 U6.7

## Polygon pours and split planes (outlines as drawn)
GND on Bottom Layer "ground_bottom_layer" (solid, remove dead copper, pour order 7): 0,0 50,0 50,50 0,50
GND on Top Layer "GND_L01_P008" (solid, remove dead copper, pour order 8): 0,0 50,0 50,50 0,50

## Keep-outs
Keep-Out Layer:
  rectangle: 38.303,3.124 42.316,5.537

## Silkscreen, mask and mechanical layers (free items; w line width, h text height)
Top Overlay:
  circle w0.3: c0.5,34.5 r0.1
  lines w0.1: 0.178,29.616 1.016,29.616 0.991,28.219 ; 0.991,11.709 0.991,11.963 1.753,11.963 ; 1.25,29.75 2.75,29.75 2.75,29.25 ; 1.829,9.881 1.829,10.922 1.905,10.922 ; 1.829,12.802 1.829,13.97 1.956,13.97 ; 2.75,28.25 2.75,28.75 ; 3.302,40.208 3.302,43.51 6.452,43.51 ; 3.5,37.25 3.75,37 ; 3.561,33.731 3.511,32.258 4.222,32.258 ; 3.654,29.055 5,29.055 5,28.445 ; 3.75,37.75 3.75,37 ; 3.948,9.475 4.05,9.475 4.05,8.84 ; 4,37.25 3.75,37 ; 4,37.5 7,37.5 7,39 ; 5.334,10.16 5.817,10.16 5.791,14.478 ; 6,31.2 7.5,31.2 7.5,30.4 ; 6.35,29.362 6.35,28.702 7.823,28.702 ; 7.112,39.853 8.915,39.853 8.9,43.6 ; 11,47.5 11.5,47.5 11.5,43.6 ; 13.5,44 18,44 18,45 18,46 ; 29,46 29,45 29,44 33,44 33.5,44 ; 34.75,5.5 34.947,5.5 35.517,5.5 35.517,4.013 ; 35,33.25 34.75,33.25 34.75,34 35,34 ; 35.25,29 35,29 35,30 35.25,30 ; 35.25,31.75 35,31.75 35,32.75 35.25,32.75 ; 35.5,2.75 36,2.75 36.25,2.75 36.25,1.25 ; 36.1,10.3 36.1,11.1 37.6,11.1 ; 37.25,6.85 37.25,7.525 38.725,7.525 ; 37.49,0.09 37.49,1.84 38.24,1.84 ; 37.9,11.1 39.3,11.1 39.3,10.3 ; 38,13.5 38,12.25 39,12.25 ; 38,34.25 38.25,34.25 38.25,34.75 38,34.75 ; 39,28.75 39,29 41.25,29 41.25,28.75 ; 39.25,1.84 40,1.84 40,0.09 ; 39.75,12.5 39.75,10.75 40.5,10.75 ; 41.25,10.25 42.25,10.25 42.25,12.25 ; 41.75,1.84 42.75,1.84 42.75,0.09 ; 42.75,28.75 42.75,29 45,29 45,28.75 ; 43.79,4.515 43.79,3.765 45.54,3.765 ; 44.25,1.75 45.75,1.75 45.75,2.5 ; 44.25,7.25 45.25,7.25 45.25,5.5 ; 47.05,3.6 47.75,3.6 47.75,4.9 ; 48.15,5.5 48.85,5.5 48.85,4.2
  text "-" at 18.5,44.783 h0.8
  text "+" at 28.05,44.517 h0.8
  text "VCC" at 3.58,36.42 h0.5 r270
  text "GPS" at 40.92,29.33 h0.5 r90
  text "UART" at 43.92,29.33 h0.5 r90
  text "D" at 49.48,23.68 h0.5
  text "C" at 49.48,22.38 h0.5
Bottom Overlay:
  lines w0.1: 1,15 4,17 4,27.5 ; 5.867,10.668 5.867,11.938 7.493,11.938 ; 9,24.25 8,25.25 ; 9,26.25 8,25.25 ; 10,23.25 11,22.25 ; 12,23.25 11,22.25 ; 13.5,44 18,44 18,46 ; 29,46 29,44 33.5,44 ; 8,25.25 11,25.25 11,22.25
  text "OFF" at 1.92,49.08 h0.5
  text "ON" at 8.42,49.08 h0.5
  text "Solar PWR +" at 17.8,42.2 h0.8
  text "Solar PWR -" at 33.8,42.2 h0.8
  text "O" at 43.42,29.08 h0.5
  text "S" at 47.92,29.08 h0.5
  text "Variant 1" at 4.92,27.92 h0.5 r90
  text "BOARD SIZE: W = 50" at 5.92,27.92 h0.5 r90
  text "BOARD SIZE: H = 50" at 6.92,27.92 h0.5 r90
  text "DeSCENT CHIPSAT" at 1.8,27.8 h0.8 r90
  text "W" at 9.92,26.17 h0.5 r90
  text "H" at 11.92,24.17 h0.5 r90
  text "Ver 2.2.1" at 3.3,23.8 h0.8 r90
  text "RF Trace W = 0.8" at 4.92,22.92 h0.5 r90
  text "GND" at 47.42,18.83 h0.5
  text "TX" at 47.42,16.259 h0.5
  text "RX" at 47.42,13.687 h0.5
  text "NRST" at 47.42,11.116 h0.5
  text "L" at 11.782,10.926 h0.5
  text "SWCLK" at 47.42,8.544 h0.5
  text "WDIO" at 47.42,5.973 h0.5
  text "GND" at 47.42,3.401 h0.5
  text "VCC" at 47.42,0.83 h0.5

## Text inside footprints (layer, text, board x,y; h text height)
U3: Top Overlay "*" at 36.75,5.75 h0.5
U6: Top Overlay "*" at 11.546,32.163 h0.5 r180